# EAGLE board working (EAGLE 9.2.2)
REV: B
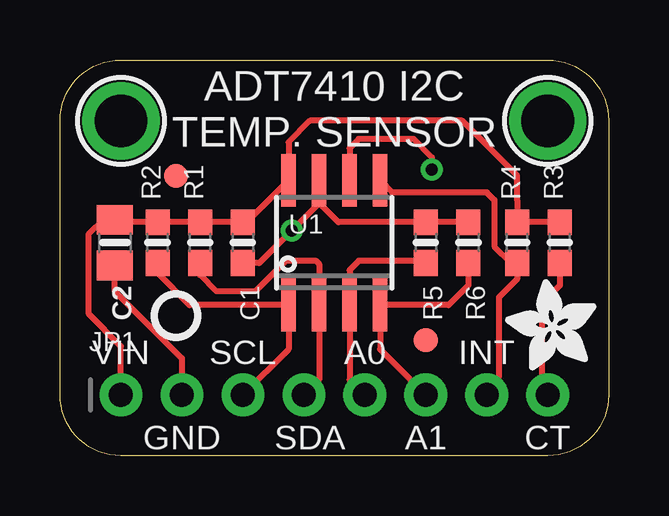
[diagram p0: board, top side]
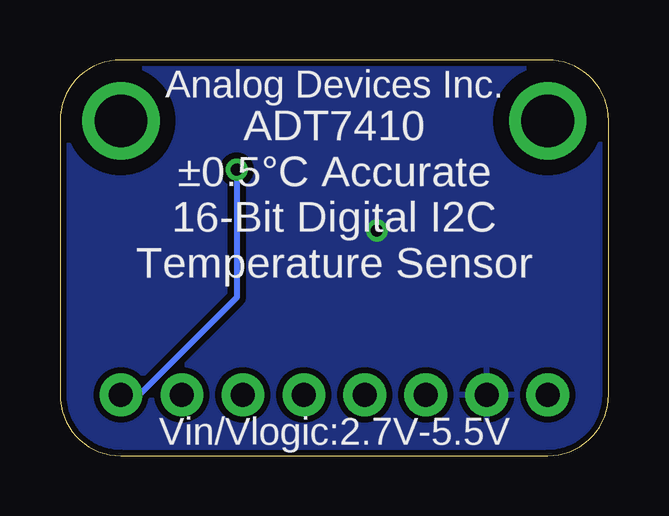
[diagram p1: board, bottom side, seen from below]

Size 22.86 x 16.51 mm. Coordinates in mm from the lower left corner, seen from the top.
Outline: 0,2.54 0,13.97 arc-90 2.54,16.51 20.32,16.51 arc-90 22.86,13.97 22.86,2.54 arc-90 20.32,0 2.54,0 arc-90 0,2.54
Copper layers (1*16): Top 0.035mm / dielectric 1.5mm / Bottom 0.035mm
Design rules "adafruit": minimum track width 8mil, minimum drill 15.5mil, track to track 8mil, track to pad 8mil, pad to pad 8mil, via to via 8mil, smd to smd 8mil, copper to edge 10mil, drill to drill 8mil, minimum pad ring 10mil, minimum via ring 8mil, stop-mask expansion 2mil, vias tented up to drill 20mil, thermal gap 10mil

## Footprints (pad centres in the part's own frame; a part is rotated, then mirrored left to right if it is on the bottom)
0603-NO = smd 1.075 x 1: 1 -0.85,0; 2 0.85,0
0805-NO = smd 1.24 x 1.5: 1 -0.95,0; 2 0.95,0
FIDUCIAL_1MM = smd 1 x 1: 1 0,0
1X08_ROUND_70 = drill 1 pad 1.778: 1 -8.89,0; 2 -6.35,0; 3 -3.81,0; 4 -1.27,0; 5 1.27,0; 6 3.81,0; 7 6.35,0; 8 8.89,0
SOIC8_150MIL = smd 0.6 x 2.2: 1 -1.905,-2.6; 2 -0.635,-2.6; 3 0.635,-2.6; 4 1.905,-2.6; 5 1.905,2.6; 6 0.635,2.6; 7 -0.635,2.6; 8 -1.905,2.6
MOUNTINGHOLE_2.0_PLATED = drill 2.2 pad 3: P$1 0,0

## Placement (x,y rotation side)
C1  0.1uF  [0603-NO]  7.62,8.89 270 top
C2  10uF  [0805-NO]  2.29,8.89 270 top
FID1  FIDUCIAL_1MM  [FIDUCIAL_1MM]  4.83,11.68 0 top
FID2  FIDUCIAL_1MM  [FIDUCIAL_1MM]  15.24,4.83 0 top
JP1  [1X08_ROUND_70]  11.43,2.54 0 top
R1  10K  [0603-NO]  5.84,8.89 90 top
R2  10K  [0603-NO]  4.06,8.89 90 top
R3  10K  [0603-NO]  20.83,8.89 90 top
R4  10K  [0603-NO]  19.05,8.89 90 top
R5  10K  [0603-NO]  15.24,8.89 270 top
R6  10K  [0603-NO]  17.02,8.89 270 top
U1  ADT7410  [SOIC8_150MIL]  11.43,8.89 0 top
U$1  [PCBFEAT-REV-040]  4.83,5.84 0 top
U$3  MOUNTINGHOLE2.0  [MOUNTINGHOLE_2.0_PLATED]  2.54,13.97 0 top
U$4  MOUNTINGHOLE2.0  [MOUNTINGHOLE_2.0_PLATED]  20.32,13.97 0 top
U$16  [ADAFRUIT_3.5MM]  22.35,3.56 90 top

## Library data of the parts
C1 C2 JP1 R1-R6 U1 U$1 U$16 = microbuilder
FID1 FID2 U$3 U$4 = microbuilder; BOM: EXCLUDE

## Nets
A0: JP1.5 R5.2 U1.3
A1: JP1.6 R6.2 U1.4
CT: JP1.8 R3.1 U1.6
GND: C1.2 C2.2 JP1.2 R5.1 R6.1 U1.7
INT: JP1.7 R4.1 U1.5
SCL: JP1.3 R2.1 U1.1
SDA: JP1.4 R1.1 U1.2
VDD: C1.1 C2.1 JP1.1 R1.2 R2.2 R3.2 R4.2 U1.8

## Tracks (layer width: path | path; a pad name or v marks a point on that pad's centre or on a via)
A0
  Top 0.254: JP1.5 12.06,3.17 U1.3 12.06,7.75 12.45,8.13 15.15,8.13 R5.2
A1
  Top 0.254: JP1.6 13.34,4.45 U1.4 16.2,6.29 17.02,7.11 R6.2
CT  (via drill 0.5)
  Top 0.254: JP1.8 20.32,2.79 20.07,3.05 20.07,6.35 20.83,7.11 R3.1 | v15.49,11.94 15.49,12.45 14.73,13.21 12.45,13.21 12.06,12.83 U1.6
  Bottom 0.254: v15.49,11.94 15.49,6.6 19.56,2.54 JP1.8
GND  (via drill 0.5)
  Top 0.254: C1.2 8.29,8.04 v9.65,9.4 10.79,10.54 | U1.7 10.79,10.54 | R6.1 R5.1 11.6,9.74 10.79,10.54 | C2.2 2.29,6.86 5.08,4.06 JP1.2
  pour Bottom (isolate 0.254): 0,2.54 0,13.97 arc-90 2.54,16.51 20.32,16.51 arc-90 22.86,13.97 22.86,2.54 arc-90 20.32,0 2.54,0 arc-90
INT
  Top 0.254: JP1.7 17.78,2.79 18.29,3.3 18.29,6.6 19.05,7.37 R4.1 18.8,8.04 18.1,8.73 18.1,10.67 17.79,10.98 13.84,10.98 U1.5
SCL
  Top 0.254: R2.1 4.06,7.62 5.39,6.29 U1.1 9.53,4.45 JP1.3
SDA
  Top 0.254: R1.1 5.84,7.53 6.52,6.86 8.13,6.86 9.4,8.13 10.67,8.13 10.79,8 U1.2 10.79,3.17 JP1.4
VDD
  Top 0.254: R3.2 R4.2 | JP1.1 2.54,4.57 1.21,5.91 1.21,9.27 1.78,9.84 C2.1 2.39,9.74 R2.2 R1.2 C1.1 7.78,9.74 U1.8 9.53,13.08 10.41,13.97 16.76,13.97 19.05,11.68 19.05,10.67 R4.2 | R4.2

## Text on the board
tPlace: ADT7410 I2C / TEMP. SENSOR | VIN | SCL | A0 | INT | GND | SDA | A1 | CT
bPlace: Analog Devices Inc. | ADT7410 / ±0.5°C Accurate / 16-Bit Digital I2C / Temperature Sensor | Vin/Vlogic:2.7V-5.5V